# Altium PCB Routed BOARD 3.pcbdoc (part 6 of 7)
Units mil, origin at the board's own origin, x right, y up, seen from the top; angles counter-clockwise.
Board outline 6225 x 7025 mil, 8 copper layers (TopLayer, MidLayer1, MidLayer2, MidLayer3, MidLayer4, MidLayer5, MidLayer6, BottomLayer); 253 components, 548 nets, 2588 pads, 2014 vias.
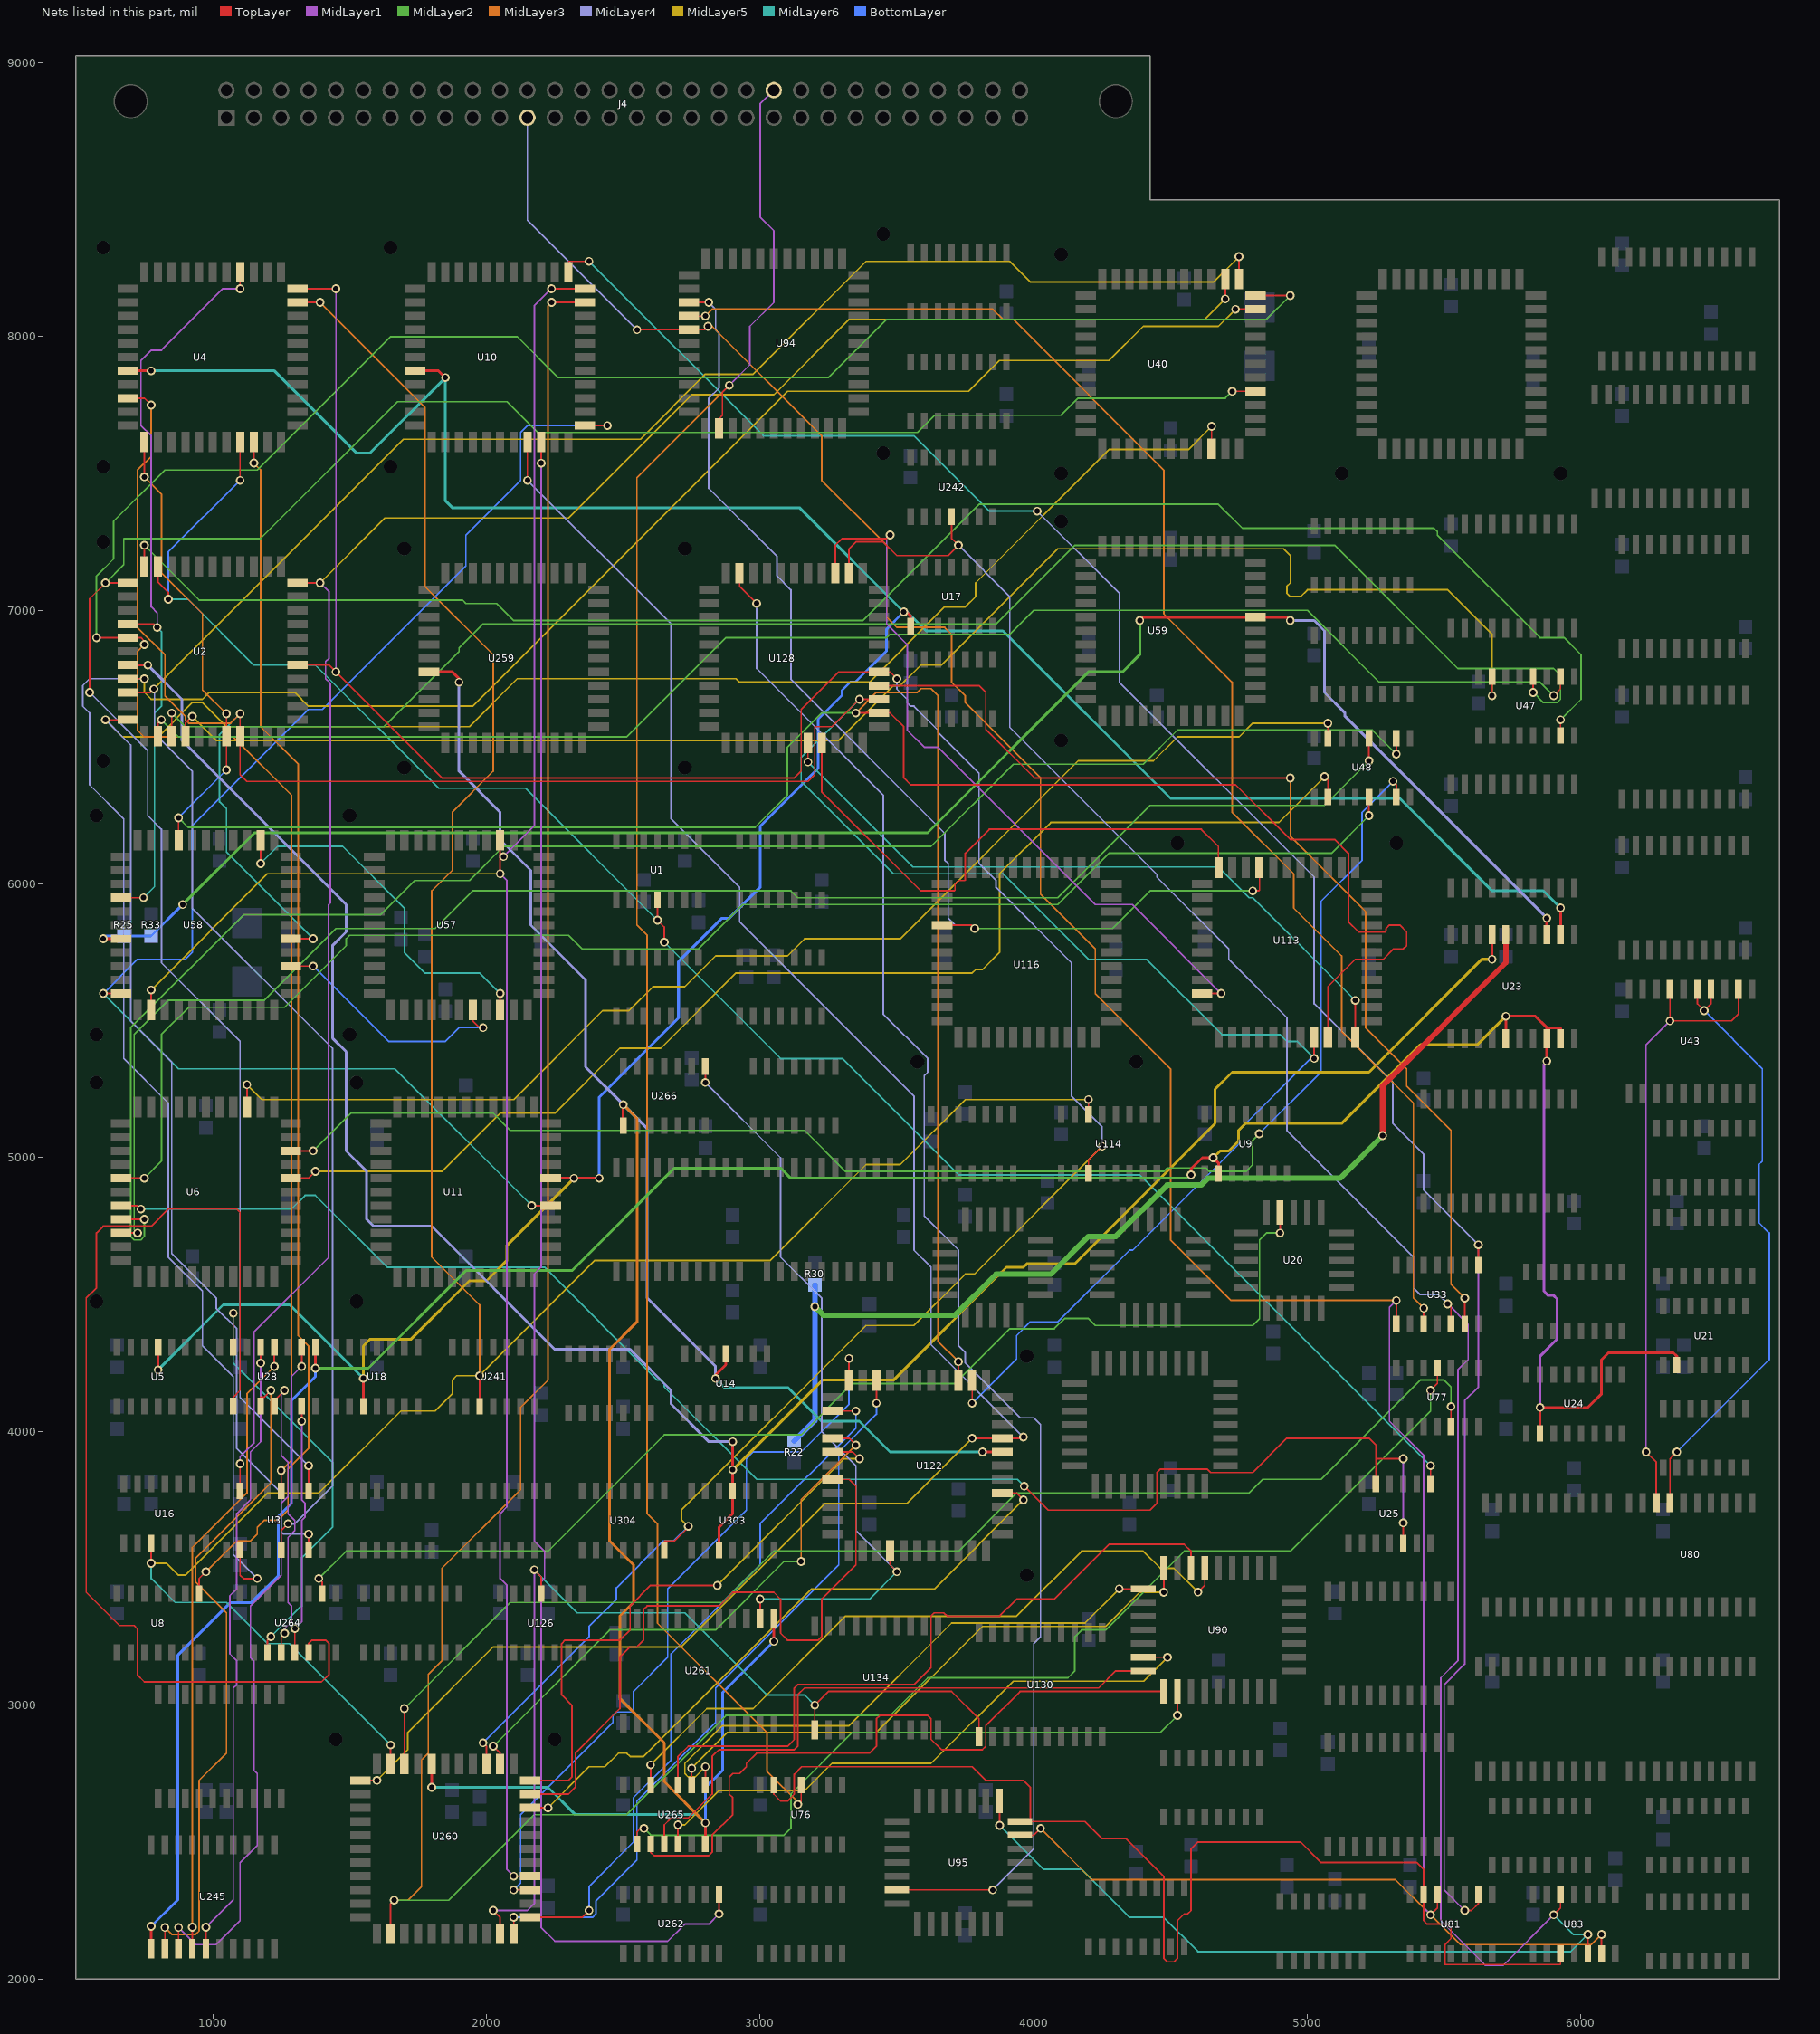
[diagram p12: the nets of this part, all layers, seen from the top]

## Via types
v1: diameter 32, hole 20, TopLayer to BottomLayer, 2014 vias

## Nets (pads, with @x,y where several pads share a name; then routed paths per layer and width w, separated by ;. In a path a pad name is that pad's centre, name@x,y a point inside that pad or via, vN(x,y) a via of type N, cw(c..) or ccw(c..) an arc to the next point about the centre after c; other vN are vias at no path point) (continued)
RFD14: U43.14 U43.15 U80.17 | length 2319.9
  TopLayer w6: U80.17@6325,3740 6325,3900 v1(6350,3925) ; U43.15@6425,5615 6425,5562.5 v1(6450,5537.5) ; v1(6450,5537.5) 6475,5562.5 ; v1(6450,5537.5) 6475,5562.5 ; 6475,5562.5 U43.14@6475,5615 6475,5562.5
  BottomLayer w6: v1(6350,3925) 6687.5,4262.5 6687.5,4725 6650,4762.5 6650,4975 6662.5,4987.5 6662.5,5325 v1(6450,5537.5)
RFD15: U43.12 U43.17 U80.18 | length 2392.1
  TopLayer w6: v1(6237.5,3925) 6275,3887.5 U80.18@6275,3740 ; U43.12@6575,5615 6575,5525 6550,5500 v1(6325,5500) ; v1(6325,5500) U43.17@6325,5615 v1(6325,5500)
  MidLayer1 w6: v1(6237.5,3925) 6237.5,5412.5 v1(6325,5500)
RFLAST: U113.4 U128.20 | length 2683
  TopLayer w6: U128.20@3275,7135 3275,7237.5 3300,7262.5 3462.5,7262.5 v1(3475,7275) ; U113.4@4615,5600 v1(4685,5600)
  MidLayer1 w6: v1(3475,7275) 3462.5,7262.5 3462.5,6950 3537.5,6875 3537.5,6562.5 3600,6500 3650,6500 4225,5925 4360,5925 v1(4685,5600)
RPA4: U113.39 U128.3 | length 2044.5
  TopLayer w6: U128.3@3225,6515 3225,6337.5 3587.5,5975 3710,5975 3712.5,5977.5 3712.5,6000 3725,6012.5 3747.5,6012.5 3750,6015 3750,6112.5 3837.5,6200 4612.5,6200 4675,6137.5 U113.39@4675,6060
RPA5: U113.17 U128.2 | length 2565.1
  TopLayer w6: v1(3175,6445.5) U128.2@3175,6515 ; U113.17@5175,5440 v1(5175,5575)
  MidLayer6 w6: v1(3175,6445.5) 3558,6062.5 4675,6062.5 4787.5,5950 4800,5950 v1(5175,5575)
RPACK: U33.5 U83.5 U83.12 U95.26 U128.19 U242.4 | length 10277.4
  TopLayer w6: U128.19@3325,7135 3325,7225 3350,7250 3450,7250 3500,7200 3687.5,7200 v1(3725,7237.5) ; v1(3875,2561) U95.26@3875,2650 ; 3700,7262.5 v1(3725,7237.5) ; 3700,7262.5 U242.4@3700,7342 3700,7262.5 ; 3700,7262.5 v1(3725,7237.5) ; 5525,4453.5 U33.5@5525,4392 5525,4453.5 ; 5525,4453.5 v1(5512.5,4466) 5525,4453.5 ; 5925,2259 v1(5900,2234) 5925,2259 ; 5925,2259 U83.12@5925,2308 5925,2259 ; U83.5@6025,2092 v1(6025,2162.5) U83.5@6025,2092
  MidLayer1 w6: v1(5512.5,4466) 5587.5,4391 5587.5,4262.5 5550,4225 5550,3162.5 5487.5,3100 5487.5,2212.5 5650,2050 5716,2050 v1(5900,2234)
  MidLayer4 w6: v1(3725,7237.5) 3912.5,7050 3912.5,6572.5 4450,6035 4450,6025 4712.5,5762.5 4712.5,5725 4925,5512.5 4925,5100 5387.5,4637.5 5387.5,4525 5412.5,4500 5478.5,4500 v1(5512.5,4466)
  MidLayer6 w6: v1(3875,2561) 4036,2400 4175,2400 4350,2225 4475,2225 4600,2100 5962.5,2100 v1(6025,2162.5) 5971.5,2162.5 v1(5900,2234)
  other v1: 6025,2162.5 5900,2234 5512.5,4466
RPRDY: U33.6 U128.10 | length 3980.9
  TopLayer w6: U128.10@3435,6725 3800,6725 3825,6700 3825,6565 4002.5,6387.5 v1(4937.5,6387.5) ; U33.6@5575,4392 v1(5575,4487.5)
  MidLayer3 w6: v1(4937.5,6387.5) 4937.5,6175 5212.5,5900 5212.5,5475 5362.5,5325 5362.5,5262.5 5525,5100 5525,4537.5 v1(5575,4487.5)
RPREQ: U95.10 U128.27 | length 5727.8
  TopLayer w6: U128.27@2925,7135 2925,7087.5 v1(2987.5,7025) ; U95.10@3500,2325 v1(3850,2325)
  MidLayer4 w6: v1(2987.5,7025) 2987.5,6787.5 3450,6325 3450,5525 3612.5,5362.5 3612.5,5312.5 3600,5300 3600,4787.5 3725,4662.5 3725,4312.5 3750,4287.5 3750,4250 3950,4050 4000,4050 4025,4025 4025,3250 4000,3225 4000,2475 v1(3850,2325)
RS0: U122.8 U260.18 | length 2539.2
  TopLayer w6: U260.18@2160,2225 2350,2225 v1(2375,2250) ; U122.8@3265,4075 v1(3350,4075)
  BottomLayer w6: v1(2375,2250) 2375,2337.5 2537.5,2500 2537.5,2662.5 2675,2800 2675,3187.5 3000,3512.5 3000,3662.5 3350,4012.5 v1(3350,4075)
RS1: U122.4 U260.17 | length 2737.2
  TopLayer w6: U260.17@2100,2165 v1(2100,2225) ; v1(3425,4103) U122.4@3425,4185
  BottomLayer w6: v1(2100,2225) 2387.5,2225 2400,2237.5 2400,2284 2550,2434 2550,2650 2837.5,2937.5 2837.5,3062.5 3287.5,3512.5 3287.5,3925 3425,4062.5 v1(3425,4103)
RS2: U122.6 U260.20 | length 2726.1
  TopLayer w6: v1(2100,2325) U260.20@2160,2325 ; U122.6@3325,4185 v1(3325,4267)
  BottomLayer w6: v1(2100,2325) 2125,2350 2125,2600 2462.5,2937.5 2462.5,2961.5 2476,2975 2531,2975 2537.5,2981.5 2537.5,3050 2662.5,3175 2662.5,3425 2950,3712.5 2950,3900 2975,3925 3150,3925 3325,4100 v1(3325,4267)
RT0: U2.2 U4.40 U58.25 U113.15 U122.42 U128.8 | length 10677.5
  TopLayer w6: v1(750,7487.5) U4.40@750,7615 ; v1(1050,6417) U2.2@1050,6540 v1(1050,6622) ; U122.42@3725,4185 v1(3725,4255) ; U113.15@5075,5440 5075,5625 5175,5725 5277.5,5725 5315,5762.5 5350,5762.5 5362.5,5775 5362.5,5825 5337.5,5850 5300,5850 5287.5,5837.5 5287.5,5827.5 5285,5825 5187.5,5825 5150,5862.5 5150,6112.5 5100,6162.5 4937.5,6162.5 4737.5,6362.5 3550,6362.5 3525,6387.5 3525,6575 3475,6625 U128.8@3435,6625 ; U128.8@3435,6625 v1(3350,6625) U128.8@3435,6625 ; U58.25@875,6160 v1(875,6242) U58.25@875,6160
  MidLayer2 w6: v1(875,6242) 910,6207 2982,6207 3100,6325 3100,6500 3225,6625 v1(3350,6625)
  MidLayer3 w6: v1(750,7487.5) 812.5,7425 812.5,7137.5 962.5,6987.5 962.5,6709.5 v1(1050,6622) ; v1(3350,6625) 3425,6700 3575,6700 3589,6714 3625,6714 3650,6689 3650,4330 v1(3725,4255)
  BottomLayer w6: v1(875,6242) v1(1050,6417)
  other v1: 875,6242 3350,6625
RT1: U2.3 U4.37 U58.11 U113.14 U122.41 U128.9 | length 10353
  TopLayer w6: U4.37@690,7775 750,7775 v1(775,7750) ; U58.11@1285,5800 v1(1367,5800) ; v1(3775,4103) U122.41@3775,4185 ; U2.3@1100,6540 1100,6400 1125,6375 3175,6375 3200,6400 3200,6575 3263,6575 v1(3363,6675) ; U2.3@1100,6540 v1(1100,6622) U2.3@1100,6540 ; v1(3363,6675) U128.9@3435,6675 v1(3363,6675) ; v1(5025,5362.5) U113.14@5025,5440 v1(5025,5362.5)
  MidLayer3 w6: v1(775,7750) 775,7562.5 725,7512.5 725,6937.5 825,6837.5 825,6687.5 900,6612.5 900,6600 912.5,6587.5 1065.5,6587.5 v1(1100,6622)
  MidLayer6 w6: v1(1100,6622) 1025,6547 1025,6300 1050,6275 1050,6117 v1(1367,5800) ; v1(3363,6675) 3150,6462 3150,6375 3487.5,6037.5 3887.5,6037.5 4200,5725 4412.5,5725 4687.5,5450 4900,5450 4925,5425 4962.5,5425 v1(5025,5362.5)
  BottomLayer w6: v1(3775,4103) 3937.5,4265.5 3937.5,4350 3987.5,4400 4087.5,4400 4350,4662.5 4362.5,4662.5 4750,5050 4750,5100 5012.5,5362.5 v1(5025,5362.5)
  other v1: 5025,5362.5 1100,6622
RTSTR: U2.32 U4.21 U58.32 | length 2858.3
  TopLayer w6: U58.32@665,5950 v1(747,5950) ; v1(1100,8175) U4.21@1100,8235 ; 784.5,6950 U2.32@690,6950 784.5,6950 ; 784.5,6950 v1(797,6937.5) 784.5,6950
  MidLayer1 w6: v1(797,6937.5) 797,6990.5 775,7012.5 775,7637.5 737.5,7675 737.5,7912.5 775,7950 812.5,7950 1037.5,8175 v1(1100,8175)
  MidLayer6 w6: v1(747,5950) 787.5,5990.5 787.5,6625 812.5,6650 812.5,6922 v1(797,6937.5)
  other v1: 797,6937.5
RXD0: U28.2 U264.6 | length 3974.9
  TopLayer w6: U28.2@1075,4093 1075,4125 1100,4150 1100,4800 1087.5,4812.5 837.5,4812.5 775,4750 600,4750 575,4725 575,4525 537.5,4487.5 537.5,3412.5 659,3291 712.5,3291 725,3278.5 725,3110 750,3085 1397.5,3085 1425,3112.5 1425,3225 1412.5,3237.5 1362.5,3237.5 1350,3225 U264.6@1350,3193
RXD1: U28.7 U264.5 | length 920.7
  TopLayer w6: U264.5@1300,3193 v1(1300,3279.5) ; v1(1325,4037.5) U28.7@1325,4093
  MidLayer1 w6: v1(1300,3279.5) 1325,3304.5 1325,3675 1337.5,3687.5 1337.5,3737.5 1325,3750 v1(1325,4037.5)
RXD2: U28.10 U264.4 | length 1177.1
  TopLayer w6: U264.4@1250,3193 1250,3250 v1(1262.5,3262.5) ; v1(1325,4237.5) U28.10@1325,4308
  MidLayer1 w6: v1(1262.5,3262.5) 1262.5,3279.5 1287.5,3304.5 1287.5,3362.5 1275,3375 1275,3612.5 1300,3637.5 1300,3675 1275,3700 1275,3725 1287.5,3737.5 1287.5,4200 v1(1325,4237.5)
RXD3: U28.15 U264.3 | length 1611.5
  TopLayer w6: U28.15@1075,4308 v1(1075,4432) ; U264.3@1200,3193 1200,3238 v1(1212.5,3250.5)
  MidLayer6 w6: v1(1075,4432) 1075,4250 1437.5,3887.5 1437.5,3650 1325,3537.5 1325,3363 v1(1212.5,3250.5)
RXDM0: U28.4 U245.12 | length 2474.8
  TopLayer w6: U245.12@825,2110 v1(825,2187.5) ; U28.4@1175,4093 1175,4125 1187.5,4125 v1(1212.5,4150)
  MidLayer3 w6: v1(825,2187.5) 850,2162.5 937.5,2162.5 950,2175 950,2725 1050,2825 1050,3337.5 937.5,3450 937.5,3537.5 1212.5,3812.5 v1(1212.5,4150)
RXDM1: U28.5 U245.13 | length 2488.5
  TopLayer w6: U245.13@875,2110 v1(875,2187.5) ; U28.5@1225,4093 1225,4113 v1(1262,4150)
  MidLayer1 w6: v1(875,2187.5) 937.5,2125 1012.5,2125 1100,2212.5 1100,2425 1162.5,2487.5 1162.5,2750 1150,2762.5 1150,3161.5 1137.5,3174 1137.5,3362.5 1250,3475 1250,3737.5 1275,3762.5 1275,3887.5 1250,3912.5 1250,4147.5 1252.5,4150 v1(1262,4150)
RXDM2: U28.12 U245.14 | length 2322.3
  TopLayer w6: U245.14@925,2110 v1(925,2189) ; v1(1225,4237.5) U28.12@1225,4308
  MidLayer3 w6: v1(925,2189) 925,3575 1125,3775 1125,4137.5 v1(1225,4237.5)
RXDM3: U28.13 U245.15 | length 2301.6
  TopLayer w6: U245.15@975,2110 v1(975,2189) ; v1(1175,4250) U28.13@1175,4308
  MidLayer1 w6: v1(975,2189) 1075,2289 1075,3062.5 1087.5,3075 1087.5,3162.5 1062.5,3187.5 1062.5,3400 1087.5,3425 1087.5,3700 1137.5,3750 1137.5,3925 1175,3962.5 v1(1175,4250)
RXDONE: U126.11 U130.11 U134.11 U260.16 | length 3805.9
  TopLayer w6: v1(2025,2250) 2050,2225 U260.16@2050,2165 ; U130.11@3800,2885 3800,2950 3700,3050 3250,3050 v1(3200,3000) ; 2200,3469.5 v1(2175,3494.5) 2200,3469.5 ; 2200,3469.5 U126.11@2200,3408 2200,3469.5 ; v1(3200,3000) U134.11@3200,2910 v1(3200,3000)
  MidLayer1 w6: v1(2025,2250) 2150,2250 2175,2275 v1(2175,3494.5)
  MidLayer6 w6: v1(2175,3494.5) 2332,3337.5 2725,3337.5 3025,3037.5 3162.5,3037.5 v1(3200,3000)
  other v1: 2175,3494.5
RXQS_10: U122.21 U261.14 U266.1 | length 2925.1
  TopLayer w6: v1(2800,5275) U266.1@2800,5333 ; U261.14@3000,3315 v1(3000,3387.5) ; 3475,3512.5 v1(3500,3487.5) 3475,3512.5 ; 3475,3512.5 U122.21@3475,3565 3475,3512.5
  MidLayer4 w6: v1(2800,5275) 3075,5000 3075,4637.5 3225,4487.5 3225,4000 3350,3875 3350,3637.5 v1(3500,3487.5)
  MidLayer6 w6: v1(3000,3387.5) 3400,3387.5 v1(3500,3487.5)
  other v1: 3500,3487.5
RXST: U2.11 U4.17 U114.3 U128.11 U260.31 U304.7 | length 10269.6
  TopLayer w6: U4.17@1310,8175 v1(1450,8175) ; v1(1450,6775) 1425,6800 ; v1(1987.5,2862.5) 2000,2850 U260.31@2000,2785 ; v1(3500,6750) 3475,6775 U128.11@3435,6775 3287.5,6775 3150,6637.5 3150,6412.5 3125,6387.5 1837.5,6387.5 1425,6800 ; 1425,6800 U2.11@1310,6800 1425,6800 ; 2650,3597.5 2652.5,3600 ; 2650,3597.5 U304.7@2650,3567 2650,3597.5 ; 2650,3597.5 2652.5,3600 ; 2652.5,3600 2687.5,3600 ; 2652.5,3600 2687.5,3600 ; 2687.5,3600 v1@2737.5,3650 ; 2687.5,3600 v1@2737.5,3650 ; v1@2737.5,3650 v1(2737.5,3653.5) v1@2737.5,3650 ; 4200,4992 U114.3@4200,4943 4200,4992 ; 4200,4992 v1(4250,5042) 4200,4992
  MidLayer1 w6: v1(1450,6775) v1(1450,8175)
  MidLayer4 w6: v1(3500,6750) 3500,6712.5 3537.5,6675 3537.5,6662.5 3550,6650 3562.5,6650 3650,6562.5 3650,6555 3800,6405 3800,6075 3862.5,6012.5 3862.5,5987.5 4137.5,5712.5 4137.5,5225 4250,5112.5 v1(4250,5042)
  MidLayer5 w6: v1(2737.5,3653.5) 2712.5,3678.5 2712.5,3712.5 3387.5,4387.5 3562.5,4387.5 3750,4575 3783,4575 v1(4250,5042)
  BottomLayer w6: v1(1987.5,2862.5) 2375,3250 2375,3287.5 2475,3387.5 2475,3428.5 2646.5,3600 2684,3600 v1(2737.5,3653.5)
  other v1: 2737.5,3653.5 4250,5042
RXTO: U10.3 U122.36 U260.40 | length 7365
  TopLayer w6: U260.40@1540,2725 v1(1600,2725) ; v1(2150,7475) U10.3@2150,7615 ; v1(3775,3975) U122.36@3885,3975 3958,3975 v1(3962.5,3979.5)
  MidLayer4 w6: v1(2150,7475) 2675,6950 2675,6237.5 2925,5987.5 2925,5862.5 3562.5,5225 3562.5,4662.5 3625,4600 3625,4317 v1(3962.5,3979.5)
  MidLayer5 w6: v1(1600,2725) 1712.5,2837.5 1712.5,2900 2025,3212.5 2712.5,3212.5 3237.5,3737.5 3537.5,3737.5 v1(3775,3975)
SCLK: U14.11 U122.35 U259.35 U260.35 U261.13 U265.7 U266.8 | length 9755.9
  TopLayer w10: U259.35@1790,6775 1875,6775 1900,6750 v1(1900,6737.5) ; v1(1800,2700) U260.35@1800,2785 ; v1(3050,3233) U261.13@3050,3315 ; v1(3813,3925) U122.35@3885,3925 ; U266.8@2500,5117 v1(2500,5194) ; U266.8@2500,5117 v1(2500,5194) ; U266.8@2500,5117 v1(2500,5194) ; U265.7@2800,2493 v1(2800,2570) ; U265.7@2800,2493 v1(2800,2570) ; U265.7@2800,2493 v1(2800,2570) ; v1@2837.5,4206 2875,4243.5 ; v1@2837.5,4206 v1(2837.5,4193.5) v1@2837.5,4206 ; v1@2837.5,4206 2875,4243.5 ; 2875,4243.5 U14.11@2875,4283 2875,4243.5
  MidLayer3 w10: v1(2500,5194) 2550,5144 2550,4400 2450,4300 2450,3600 2537.5,3512.5 2537.5,3375 2487.5,3325 2487.5,3025 2650,2862.5 2650,2720 v1(2800,2570)
  MidLayer4 w10: v1(1900,6737.5) 1900,6412.5 2050,6262.5 2050,6162.5 2162.5,6050 2162.5,5850 2362.5,5650 2362.5,5331.5 v1(2500,5194) 2587.5,5106.5 2587.5,4487.5 2837.5,4237.5 v1(2837.5,4193.5)
  MidLayer6 w10: v1(1800,2700) 2225,2700 2325,2600 2770,2600 v1(2800,2570) ; v1(2837.5,4193.5) 2871,4160 3102.5,4160 3225,4037.5 3362.5,4037.5 3475,3925 v1(3813,3925)
  BottomLayer w10: v1(2800,2570) 2800,2698.5 2862.5,2761 2862.5,3045.5 v1(3050,3233)
  other v1: 2800,2570 2800,2570 2837.5,4193.5 2500,5194 2500,5194
SCT0: U57.2 U58.9 | length 926
  TopLayer w6: U58.9@1285,5700 v1(1367,5700) ; U57.2@1950,5540 1950,5500 1975,5475 v1(1988,5475)
  BottomLayer w6: v1(1367,5700) 1642,5425 1850,5425 1900,5475 v1(1988,5475)
SCT1: U57.4 U58.19 | length 1363.7
  TopLayer w6: v1(1175,6075) U58.19@1175,6160 ; U57.4@2050,5540 v1(2050,5600)
  MidLayer6 w6: v1(1175,6075) 1237.5,6137.5 1475,6137.5 1700,5912.5 1700,5750 1775,5675 1975,5675 v1(2050,5600)
SE0: U2.39 U3.7 U40.4 | length 8289.2
  TopLayer w6: U3.7@1350,3568 v1(1350,3625) ; U40.4@4650,7590 v1(4650,7672) ; v1(608,6600) U2.39@690,6600 v1(608,6600)
  MidLayer4 w6: v1(608,6600) 700,6508 700,5500 850,5350 850,4650 1012.5,4487.5 1012.5,4450 1087.5,4375 1087.5,3937.5 1250,3775 1250,3633 1258,3625 v1(1350,3625)
  MidLayer5 w6: v1(608,6600) 670.5,6537.5 800,6537.5 925,6662.5 962.5,6662.5 1050,6575 1937.5,6575 2112.5,6750 2912.5,6750 2925,6737.5 3400,6737.5 3675,7012.5 3750,7012.5 3787.5,7050 3787.5,7100 4275,7587.5 4565.5,7587.5 v1(4650,7672)
  other v1: 608,6600
SE180: U2.29 U3.10 U40.10 | length 8477.5
  TopLayer w6: v1(550,6700) 550,7042 v1(608,7100) ; U3.10@1350,3783 v1(1350,3875) ; v1(4725,7800) U40.10@4810,7800 ; v1(608,7100) U2.29@690,7100 v1(608,7100)
  MidLayer2 w6: v1(608,7100) 675,7167 675,7262.5 1175,7262.5 1675,7762.5 2075,7762.5 2187.5,7650 3575,7650 3637.5,7712.5 4100,7712.5 4162.5,7775 4700,7775 v1(4725,7800)
  MidLayer4 w6: v1(550,6700) 762.5,6487.5 762.5,6250 812.5,6200 812.5,5712.5 1100,5425 1100,4125 v1(1350,3875)
SL0: U2.33 U3.12 U40.17 | length 9078.3
  TopLayer w6: v1(575,6900) U2.33@690,6900 737.5,6900 750,6887.5 v1(750,6875) ; U3.12@1250,3783 v1(1250,3857) ; U40.17@4810,8150 v1(4937.5,8150)
  MidLayer2 w6: v1(575,6900) 575,7125 637.5,7187.5 637.5,7325 825,7512.5 1162.5,7512.5 1650,8000 2112.5,8000 2262.5,7850 3250,7850 3462.5,8062.5 4850,8062.5 v1(4937.5,8150)
  MidLayer3 w6: v1(750,6875) 725,6850 725,6562.5 750,6537.5 1075,6537.5 1287.5,6325 1287.5,3894.5 v1(1250,3857)
SL180: U2.17 U3.15 U40.19 | length 7453.6
  TopLayer w6: U3.15@1100,3783 v1(1100,3882) ; v1(4700,8137.5) U40.19@4700,8210 ; U2.17@1310,7100 v1(1392,7100) U2.17@1310,7100
  MidLayer1 w6: v1(1100,3882) 1100,3907 1150,3957 1150,4362.5 1423.5,4636 1423.5,5925 1429.5,5931 1429.5,6733 1412.5,6750 1412.5,6812.5 1425,6825 1425,7067 v1(1392,7100)
  MidLayer5 w6: v1(1392,7100) 1629.5,7337.5 2300,7337.5 2750,7787.5 3050,7787.5 3325,8062.5 4625,8062.5 v1(4700,8137.5)
  other v1: 1392,7100
SLOT: U1.11 U2.27 U4.3 U25.8 | length 7124.5
  TopLayer w6: v1(1100,7475) U4.3@1100,7615 ; v1(2650,5787.5) 2650,5843 v1(2625,5868) ; U25.8@5450,3808 v1(5450,3875) ; 800,7103 U2.27@800,7160 800,7103 ; 800,7103 837.5,7065.5 ; 800,7103 837.5,7065.5 ; 837.5,7065.5 v1(837.5,7040.5) 837.5,7065.5 ; v1(2625,5868) U1.11@2625,5942 v1(2625,5868)
  MidLayer6 w6: v1(837.5,7040.5) 909.5,7040.5 1150,6800 1375,6800 1825,6350 2143,6350 v1(2625,5868) ; v1(2650,5787.5) 3075,5362.5 3300,5362.5 3725,4937.5 4387.5,4937.5 v1(5450,3875)
  BottomLayer w6: v1(837.5,7040.5) 837.5,7212.5 v1(1100,7475)
  other v1: 837.5,7040.5
SLOTCLK: U6.35 U25.5 U25.12 | length 5931.9
  TopLayer w6: U6.35@665,4825 725,4825 v1(737.5,4812.5) ; v1(3965,3800) 4052.5,3712.5 4425,3712.5 4450,3737.5 4450,3850 4462.5,3862.5 4633.5,3862.5 4646,3850 4800,3850 4925,3975 5225,3975 5250,3950 U25.12@5250,3808 5250,3900 v1(5350,3900) ; U25.5@5350,3592 v1(5350,3666)
  MidLayer1 w6: v1(5350,3666) v1(5350,3900)
  MidLayer6 w6: v1(737.5,4812.5) 1287.5,4812.5 1337.5,4862.5 1375,4862.5 1637.5,4600 2212.5,4600 2625,4187.5 2637.5,4187.5 2650,4175 2650,4162.5 2987.5,3825 3940,3825 v1(3965,3800)
SLOTL0: U6.20 U48.15 | length 4678.6
  TopLayer w6: U6.20@1125,5185 v1(1125,5267) ; U48.15@5075,6533 v1(5075,6587.5)
  MidLayer5 w6: v1(1125,5267) 1179.5,5212.5 2100,5212.5 2425,5537.5 2521.5,5537.5 2609,5625 2725,5625 2837.5,5737.5 3100,5737.5 3162.5,5800 3512.5,5800 4162.5,6450 4437.5,6450 4525,6537.5 4750,6537.5 4800,6587.5 v1(5075,6587.5)
SLOTL1: U6.37 U48.12 | length 5820.6
  TopLayer w6: U6.37@665,4725 v1(725,4725) ; v1(5225,6450) U48.12@5225,6533
  MidLayer2 w6: v1(725,4725) 712.5,4737.5 712.5,5450 837.5,5575 1187.5,5575 1450,5837.5 1812.5,5837.5 1950,5975 3112.5,5975 3137.5,5950 4087.5,5950 4425,6287.5 5062.5,6287.5 v1(5225,6450)
SLOTL2: U6.36 U48.10 | length 6140.1
  TopLayer w6: U6.36@665,4775 v1(750,4775) ; v1(5325,6475) U48.10@5325,6533
  MidLayer2 w6: v1(750,4775) 750,4712.5 737.5,4700 712.5,4700 700,4712.5 700,5475 1112.5,5887.5 1612.5,5887.5 1737.5,6012.5 1937.5,6012.5 2062.5,6137.5 3625,6137.5 3925,6437.5 4400,6437.5 4525,6562.5 5237.5,6562.5 v1(5325,6475)
SLOTL3: U6.15 U48.7 | length 5355.1
  TopLayer w6: U6.15@1285,5025 v1(1367,5025) ; v1(5313,6375) 5325,6363 U48.7@5325,6318
  MidLayer2 w6: v1(1367,5025) 1504.5,5162.5 2025,5162.5 2087.5,5100 3162.5,5100 3312.5,4950 4475,4950 4487.5,4962.5 4629.5,4962.5 4642,4950 4775,4950 4800,4975 4800,5063.5 v1(4824,5087.5)
  BottomLayer w6: v1(4824,5087.5) 5050,5313.5 5050,5937.5 5200,6087.5 5200,6262 v1(5313,6375)
SLOTL4: U6.33 U48.5 | length 5503.8
  TopLayer w6: U6.33@665,4925 v1(750,4925) ; v1(5225,6250) U48.5@5225,6318
  MidLayer2 w6: v1(750,4925) 812.5,4987.5 812.5,5450 912.5,5550 1262.5,5550 1487.5,5775 1487.5,5800 1500,5812.5 2300,5812.5 2350,5762.5 2775,5762.5 2937.5,5925 4087.5,5925 4275,6112.5 5087.5,6112.5 v1(5225,6250)
SLOTL5: U6.13 U48.2 | length 4632.7
  TopLayer w6: U6.13@1285,4925 1350,4925 v1(1375,4950) ; v1(5062.5,6392) 5075,6379.5 U48.2@5075,6318
  MidLayer5 w6: v1(1375,4950) 1837.5,4950 2050,5162.5 2250,5162.5 2487.5,5400 2637.5,5400 2912.5,5675 3775,5675 3787.5,5687.5 3812.5,5687.5 3875,5750 3875,6037.5 4062.5,6225 4895.5,6225 v1(5062.5,6392)
SM0: U2.36 U3.2 U40.16 | length 8794.6
  TopLayer w6: U3.2@1100,3568 1100,3475 1112.5,3462.5 v1(1162.5,3462.5) ; v1(4737.5,8100) U40.16@4810,8100 ; U2.36@690,6750 v1(750,6750) U2.36@690,6750
  MidLayer4 w6: v1(750,6750) 550,6750 525,6725 525,6650 550,6625 550,6362.5 675,6237.5 675,5362.5 837.5,5200 837.5,4637.5 962.5,4512.5 962.5,4312.5 1075,4200 1075,3550 v1(1162.5,3462.5)
  MidLayer5 w6: v1(750,6750) 750,6700 775,6675 962.5,6675 987.5,6700 1300,6700 1350,6650 1950,6650 3100,7800 3762.5,7800 3875,7912.5 4275,7912.5 4400,8037.5 4675,8037.5 v1(4737.5,8100)
  other v1: 750,6750
SM180: U2.37 U3.5 U40.18 | length 8470.5
  TopLayer w6: U3.5@1250,3568 1250,3637.5 v1(1275,3662.5) ; U40.18@4750,8210 v1(4750,8292) ; 772,6700 v1(784.5,6712.5) 772,6700 ; 772,6700 U2.37@690,6700 772,6700
  MidLayer4 w6: v1(784.5,6712.5) 787.5,6709.5 787.5,6550 925,6412.5 925,5912.5 1437.5,5400 1437.5,3800 1300,3662.5 v1(1275,3662.5)
  MidLayer5 w6: v1(784.5,6712.5) 1697,7625 2562.5,7625 2800,7862.5 2975,7862.5 3387.5,8275 3912.5,8275 3987.5,8200 4658,8200 v1(4750,8292)
  other v1: 784.5,6712.5
STDMA: U94.9 U113.36 U116.21 | length 4258.9
  TopLayer w6: U94.9@2740,8125 v1(2812.5,8125) ; v1(4800,5975) 4822.5,5975 4825,5977.5 U113.36@4825,6060 ; 3772,5850 U116.21@3665,5850 3772,5850 ; 3772,5850 v1(3784.5,5837.5) 3772,5850
  MidLayer2 w6: v1(3784.5,5837.5) 4287.5,5837.5 4425,5975 v1(4800,5975)
  MidLayer4 w6: v1(2812.5,8125) 2837.5,8100 2837.5,8025 2850,8012.5 2850,7812.5 2812.5,7775 2812.5,7445.5 3062,7196 3062,7125.5 3112.5,7075 3112.5,6748 3675,6185.5 3675,6087.5 3687.5,6075 3687.5,5875 3712.5,5850 3772,5850 v1(3784.5,5837.5)
  other v1: 3784.5,5837.5
SYMCLK: R25.2 R33.2 U23.13 U58.35 U59.13 | length 6554.7
  TopLayer w10: v1(600,5800) U58.35@665,5800 ; v1(4387.5,6962.5) 4400,6975 U59.13@4810,6975 4925,6975 v1(4937.5,6962.5) ; U23.13@5875,5815 v1(5875,5875)
  MidLayer2 w10: v1(890,5925) 1152.5,6187.5 3612.5,6187.5 4200,6775 4325,6775 4387.5,6837.5 v1(4387.5,6962.5)
  MidLayer4 w10: v1(4937.5,6962.5) 5025,6962.5 5062.5,6925 5062.5,6700 5137.5,6625 5137.5,6612.5 v1(5875,5875)
  BottomLayer w10: v1(600,5800) 610,5810 R25.2@675,5810 R33.2@775,5810 v1(890,5925)
SYMCLK1: U4.35 U5.11 U10.35 U11.13 U17.1 U18.3 U23.12 | length 12322.1
  TopLayer w10: U4.35@690,7875 v1(775,7875) ; v1(800,4225) U5.11@800,4308 ; v1(2320,4925) U11.13@2235,4925 v1(2412.5,4925) ; U23.12@5925,5815 v1(5925,5912.5) ; 1825,7875 v1(1850,7850) 1825,7875 ; 1825,7875 U10.35@1740,7875 1825,7875 ; v1(3525,6994) v1@3535,6994 ; v1(3525,6994) v1@3535,6994 ; v1(3525,6994) v1@3535,6994 ; v1@3535,6994 3550,6979 ; v1@3535,6994 3550,6979 ; v1@3535,6994 3550,6979 ; U17.1@3550,6942 3550,6979 ; U17.1@3550,6942 3550,6979 ; U17.1@3550,6942 3550,6979 ; U18.3@1550,4092 v1(1550,4194) U18.3@1550,4092
  MidLayer5 w10: v1(1550,4194) 1550,4312.5 1575,4337.5 1725,4337.5 1937.5,4550 2000,4550 2075,4625 2075,4680 v1(2320,4925)
  MidLayer6 w10: v1(775,7875) 1225,7875 1525,7575 1575,7575 v1(1850,7850) 1850,7400 1875,7375 3144,7375 v1(3525,6994) 3537.5,6994 3606.5,6925 3887.5,6925 4500,6312.5 5337.5,6312.5 5675,5975 5862.5,5975 v1(5925,5912.5) ; v1(800,4225) 1037.5,4462.5 1281.5,4462.5 v1(1550,4194)
  BottomLayer w10: v1(2412.5,4925) 2412.5,5221.5 2702,5511 2702,5716.5 2860.5,5875 2887.5,5875 3000,5987.5 3000,6210.5 3212.5,6423 3212.5,6602 3300,6689.5 3300,6708 3329.5,6737.5 3348,6737.5 3462.5,6852 3462.5,6931.5 v1(3525,6994)
  other v1: 1550,4194 3525,6994 3525,6994 1850,7850
SYMCLK2: R22.2 R30.2 U23.16 | length 3960
  TopLayer w20: v1(5275,5081) 5275,5262.5 5725,5712.5 U23.16@5725,5815
  MidLayer2 w20: v1(3200,4456) 3231,4425 3712.5,4425 3862.5,4575 4062.5,4575 4200,4712.5 4300,4712.5 4487.5,4900 4612.5,4900 4637.5,4925 5119,4925 v1(5275,5081)
  BottomLayer w20: R22.2@3125,3965 3200,4040 R30.2@3200,4535 v1(3200,4456)
SYMCLKM: U9.2 U21.2 U23.5 U23.8 U23.9 U24.2 U28.9 U245.11 | length 10441.8
  TopLayer w10: U245.11@775,2110 v1(775,2192) ; v1(4575,4937.5) 4575,4959 4616,5000 v1(4656,5000) ; v1(5875,5353) U23.8@5875,5435 ; U23.9@5925,5435 5925,5472.5 5922.5,5475 5875,5475 ; U21.2@6350,4242 6350,4275 6337.5,4287.5 6100,4287.5 6075,4262.5 6075,4137.5 6025,4087.5 v1(5850,4087.5) ; v1(4656,5000) 4675,4981 ; v1(4656,5000) 4675,4981 ; 4675,4981 U9.2@4675,4942 4675,4981 ; v1(5725,5517) U23.5@5725,5435 v1(5725,5517) ; v1(5725,5517) 5833,5517 5875,5475 ; v1(5850,4087.5) U24.2@5850,3993 v1(5850,4087.5) ; U23.8@5875,5435 5875,5475 ; U23.8@5875,5435 5875,5475 ; v1(1375,4231) U28.9@1375,4308 v1(1375,4231)
  MidLayer1 w10: v1(5850,4087.5) 5850,4275 5912.5,4337.5 5912.5,4484 5900,4496.5 5880.5,4496.5 5864.5,4512.5 5864.5,5342.5 v1(5875,5353)
  MidLayer2 w10: v1(1375,4231) 1568.5,4231 1925,4587.5 2312.5,4587.5 2687.5,4962.5 3075,4962.5 3112.5,4925 4562.5,4925 v1(4575,4937.5)
  MidLayer5 w10: v1(4656,5000) 4681,5025 4712.5,5025 4748,5060.5 4748,5100 4773,5125 5125,5125 5412.5,5412.5 5620.5,5412.5 v1(5725,5517)
  BottomLayer w10: v1(775,2192) 873,2290 873,3183 1065,3375 1141.5,3375 1239.5,3473 1239.5,3689.5 1287.5,3737.5 1287.5,4112.5 1375,4200 v1(1375,4231)
  other v1: 1375,4231
SYMCLKN: U2.35 U23.17 U303.3 U303.11 | length 8377.6
  TopLayer w10: U2.35@690,6800 v1(762.5,6800) ; U303.3@2850,3567 2850,3650 2900,3700 U303.11@2900,3783 ; v1(2900,3860) U303.11@2900,3783 ; v1(2900,3962.5) U303.11@2900,3783 ; v1(5675,5725) U23.17@5675,5815
  MidLayer4 w10: v1(762.5,6800) 887.5,6675 887.5,6525 1487.5,5925 1487.5,5825 1437.5,5775 1437.5,5437.5 1487.5,5387.5 1487.5,5025 1562.5,4950 1562.5,4775 1587.5,4750 1800,4750 2250,4300 2525,4300 2675,4150 2675,4100 2812.5,3962.5 v1(2900,3962.5)
  MidLayer5 w10: v1(2900,3860) 3227.5,4187.5 3487.5,4187.5 3900,4600 3962.5,4600 3975,4612.5 4150,4612.5 4662.5,5125 4662.5,5250 4725,5312.5 5225,5312.5 5637.5,5725 v1(5675,5725)
SYMLD: U20.12 U264.10 | length 4359.2
  TopLayer w6: v1(1387.5,3462.5) 1400,3450 U264.10@1400,3408 ; v1(4900,4725) U20.12@4900,4800
  MidLayer2 w6: v1(1387.5,3462.5) 1487.5,3562.5 2225,3562.5 2650,3987.5 3150,3987.5 3337.5,4175 3712.5,4175 3912.5,4375 4075,4375 4112.5,4412.5 4200,4412.5 4225,4387.5 4800,4387.5 4825,4412.5 4825,4700 4850,4725 v1(4900,4725)
TC0: U122.10 U260.30 | length 2083.1
  TopLayer w6: v1(2025,2850) 2050,2825 U260.30@2050,2785 ; U122.10@3265,3975 3325,3975 v1(3350,3950)
  MidLayer2 w6: v1(2025,2850) 2450,3275 2837.5,3275 3087.5,3525 v1(3150,3525)
  MidLayer3 w6: v1(3150,3525) 3150,3750 v1(3350,3950)
TC1: U122.11 U260.28 | length 2187.9
  TopLayer w6: U260.28@2160,2725 2300,2725 2312.5,2737.5 2312.5,3000 2275,3037.5 2275,3225 2287.5,3237.5 2487.5,3237.5 2525,3275 2525,3362.5 2600,3437.5 v1(2844,3437.5) ; U122.11@3265,3925 3338,3925 v1(3363,3900)
  MidLayer5 w6: v1(2844,3437.5) 3306.5,3900 v1(3363,3900)
TC2: U122.13 U260.27 | length 2467.5
  TopLayer w6: U260.27@2160,2675 2300,2675 2325,2700 2325,2825 2487.5,2987.5 2487.5,3175 2525,3212.5 2550,3212.5 2575,3237.5 2575,3350 2587.5,3362.5 2850,3362.5 2900,3412.5 3050,3412.5 3075,3387.5 3075,3262.5 3100,3237.5 3212.5,3237.5 3225,3250 3225,3387.5 3350,3512.5 3350,3800 3325,3825 U122.13@3265,3825
TC3: U122.32 U260.26 | length 2366.7
  TopLayer w6: U260.26@2160,2625 v1(2225,2625) ; U122.32@3885,3775 3937.5,3775 v1(3962.5,3750)
  MidLayer5 w6: v1(2225,2625) 2375,2775 2433,2775 2483,2825 2512.5,2825 2525,2812.5 2575,2812.5 3187.5,3425 3637.5,3425 v1(3962.5,3750)
TDACK: U76.13 U81.13 U83.3 U95.25 | length 4470.9
  TopLayer w6: U76.13@3050,2708 3050,2675 3075,2650 3100,2650 3125,2675 3125,2747.5 3152.5,2775 3775,2775 3825,2725 3962.5,2725 3987.5,2700 3987.5,2575 U95.25@3950,2575 4187.5,2575 4250,2512.5 4337.5,2512.5 4475,2375 4475,2075 4487.5,2062.5 4512.5,2062.5 4525,2075 4525,2212.5 4550,2237.5 4562.5,2237.5 4575,2250 4575,2475 4600,2500 4975,2500 5050,2425 5400,2425 5425,2400 U81.13@5425,2308 5425,2212.5 5437.5,2200 5512.5,2200 5525,2187.5 5525,2147.5 5502.5,2125 5502.5,2052.5 5925,2052.5 U83.3@5925,2092
TDRDY: J4.42 U76.11 U94.19 | length 7187.9
  TopLayer w6: v1(3137.5,2637.5) 3150,2650 U76.11@3150,2708 ; U94.19@2850,7700 U94.19@2850,7665 U94.19@2850,7700 ; U94.19@2850,7700 2862.5,7712.5 ; U94.19@2850,7700 2862.5,7712.5 ; 2862.5,7712.5 2862.5,7797 ; 2862.5,7712.5 2862.5,7797 ; 2862.5,7797 v1(2887.5,7822) 2862.5,7797
  MidLayer1 w6: v1(2887.5,7822) 2962.5,7897 2962.5,8037.5 3050,8125 3050,8387.5 3000,8437.5 3000,8850 J4.42@3050,8900
  MidLayer3 w6: v1(2887.5,7822) 2550,7484.5 2550,5850 2587.5,5812.5 2587.5,3700 2625,3662.5 2625,3300 3025,2900 3025,2759 3146.5,2637.5 v1(3137.5,2637.5)
  other v1: 2887.5,7822
TF0: U90.10 U265.14 | length 2556.6
  TopLayer w6: U265.14@2600,2708 v1(2600,2782) ; v1(4600,3413) 4625,3438 U90.10@4625,3500
  MidLayer5 w6: v1(2600,2782) 2805.5,2987.5 2975,2987.5 3312.5,3325 3937.5,3325 4175,3562.5 4400,3562.5 4462.5,3500 4513,3500 v1(4600,3413)
TF1: U90.11 U265.12 | length 2604.3
  TopLayer w6: U265.12@2700,2708 2700,2812.5 2737.5,2850 3100,2850 3125,2875 3125,3062.5 3137.5,3075 3562.5,3075 3625,3137.5 3625,3326.5 3636,3337.5 3671.5,3337.5 3684,3325 3875,3325 3937.5,3387.5 4075,3387.5 4275,3587.5 4550,3587.5 4575,3562.5 U90.11@4575,3500
TF2: U90.13 U265.11 | length 2140.3
  TopLayer w6: U265.11@2750,2708 v1(2750,2769.5) ; v1(4475,3412.5) U90.13@4475,3500
  MidLayer5 w6: v1(2750,2769.5) 2880.5,2900 3425,2900 3812.5,3287.5 4262.5,3287.5 4387.5,3412.5 v1(4475,3412.5)
TF3: U90.14 U265.10 | length 2139.3
  TopLayer w6: U265.10@2800,2708 v1(2800,2775) ; v1(4312.5,3425) U90.14@4400,3425
  MidLayer5 w6: v1(2800,2775) 2762.5,2737.5 2737.5,2737.5 2725,2750 2725,2787.5 2862.5,2925 3325,2925 3700,3300 4187.5,3300 v1(4312.5,3425)
TF4: U90.19 U265.5 | length 2201.2
  TopLayer w6: U265.5@2700,2493 v1(2700,2562.5) ; U90.19@4400,3175 v1(4489,3175)
  MidLayer5 w6: v1(2700,2562.5) 2724.5,2562.5 2849.5,2687.5 3162.5,2687.5 3262.5,2787.5 3625,2787.5 3925,3087.5 4401.5,3087.5 v1(4489,3175)
TF5: U90.20 U265.4 | length 2242.9
  TopLayer w6: U265.4@2650,2493 2650,2562.5 2675,2587.5 2737.5,2587.5 2825,2675 2825,2812.5 2850,2837.5 3125,2837.5 3137.5,2850 3137.5,3037.5 3162.5,3062.5 4237.5,3062.5 4300,3125 U90.20@4400,3125
TF6: U90.21 U265.3 | length 2551.4
  TopLayer w6: U265.3@2600,2493 2600,2462.5 2612.5,2450 2812.5,2450 2825,2462.5 2825,2525 2900,2600 2900,2662.5 2887.5,2675 2887.5,2737.5 2900,2750 2925,2750 2950,2775 2950,2787.5 2987.5,2825 3400,2825 3425,2850 3425,2950 3437.5,2962.5 3612.5,2962.5 3625,2950 3625,2875 3662.5,2837.5 3812.5,2837.5 3825,2850 3825,2925 3950,3050 U90.21@4475,3050
TF7: U90.22 U265.2 | length 2377
  TopLayer w6: U265.2@2550,2493 2550,2537.5 2562.5,2550 v1(2575.5,2550) ; v1(4525,2962.5) U90.22@4525,3050
  MidLayer2 w6: v1(2575.5,2550) 2600.5,2525 3087.5,2525 3112.5,2550 3112.5,2675 3337.5,2900 4462.5,2900 v1(4525,2962.5)
TFAN: U4.4 U8.8 | length 4514.1
  TopLayer w6: U8.8@950,3408 950,3462.5 v1(975,3487.5) ; v1(1150,7538) U4.4@1150,7615
  MidLayer3 w6: v1(975,3487.5) 1087.5,3600 1137.5,3600 1162.5,3625 1162.5,3650 1187.5,3675 1237.5,3675 1275,3712.5 1275,3862.5 1350,3937.5 1350,4312.5 1312.5,4350 1312.5,6437.5 1175,6575 1175,7513 v1(1150,7538)
TFDONE: U10.16 U77.11 U260.8 | length 11252
  TopLayer w6: v1(2238,8125) U10.16@2360,8125 ; v1(5450,4150) 5475,4175 U77.11@5475,4233 ; 1650,2275 v1(1662.5,2287.5) 1650,2275 ; 1650,2275 U260.8@1650,2165 1650,2275
  MidLayer2 w6: v1(1662.5,2287.5) 1862.5,2287.5 2175,2600 2512.5,2600 2875,2962.5 3475,2962.5 3612.5,3100 4125,3100 4150,3125 4150,3250 4175,3275 4262.5,3275 4550,3562.5 4937.5,3562.5 5450,4075 v1(5450,4150)
  MidLayer3 w6: v1(1662.5,2287.5) 1712.5,2287.5 1762.5,2337.5 1762.5,2800 1787.5,2825 1787.5,3112.5 1837.5,3162.5 1837.5,3500 2125,3787.5 2125,4087.5 2225,4187.5 2225,8112 v1(2238,8125)
  other v1: 1662.5,2287.5
TFLAST: U77.5 U260.37 | length 4680.4
  TopLayer w6: U260.37@1700,2785 v1(1700,2987.5) ; U77.5@5525,4017 v1(5525,4091)
  MidLayer2 w6: v1(1700,2987.5) 2087.5,3375 2862.5,3375 3050,3562.5 3725,3562.5 3937.5,3775 4787.5,3775 4837.5,3825 5050,3825 5412.5,4187.5 5500,4187.5 5525,4162.5 v1(5525,4091)
TPACK: J4.23 U33.1 U81.12 U83.6 U94.11 U95.24 | length 12968.8
  TopLayer w6: v1(2550,8025) U94.11@2740,8025 2797,8025 v1(2809.5,8037.5) ; U83.6@6075,2092 v1(6075,2162.5) ; 4000,2525 U95.24@3950,2525 4000,2525 ; 4000,2525 v1(4025,2550) 4000,2525 ; 5475,2259 v1(5450,2234) 5475,2259 ; 5475,2259 U81.12@5475,2308 5475,2259 ; U33.1@5325,4392 v1(5325,4478.5) U33.1@5325,4392
  MidLayer1 w6: v1(5325,4478.5) 5300,4453.5 5300,4037.5 5425,3912.5 5425,2259 v1(5450,2234)
  MidLayer3 w6: v1(2809.5,8037.5) 2825,8037.5 3225,7637.5 3225,7475 3462.5,7237.5 3462.5,6975 3500,6937.5 3675,6937.5 3700,6912.5 3700,6737.5 3750,6687.5 3750,6662.5 4025,6387.5 4025,5962.5 4225,5762.5 4225,5600 4500,5325 4500,4700 4721.5,4478.5 v1(5325,4478.5) ; v1(5450,2234) 5321.5,2362.5 ; v1(6075,2162.5) 6037.5,2125 5559,2125 5321.5,2362.5 ; 4212.5,2362.5 v1(4025,2550) 4212.5,2362.5 ; 4212.5,2362.5 5321.5,2362.5 ; 4212.5,2362.5 5321.5,2362.5
  MidLayer4 w6: J4.23@2150,8800 2150,8425 v1(2550,8025)
  other v1: 5450,2234 4025,2550 5325,4478.5
TPRDY: U33.3 U94.10 | length 5502.7
  TopLayer w6: U94.10@2740,8075 v1(2800,8075) ; U33.3@5425,4392 v1(5425,4450)
  MidLayer3 w6: v1(2800,8075) 2825,8100 3850,8100 3887.5,8062.5 3925,8062.5 4475,7512.5 4475,6987.5 4725,6737.5 4725,6262.5 4950,6037.5 4950,5912.5 5125,5737.5 5125,5462.5 5387.5,5200 5387.5,4487.5 v1(5425,4450)
TRC0: U2.43 U47.15 | length 5702.9
  TopLayer w6: U2.43@900,6540 900,6587.5 v1(925,6612.5) ; v1(5675,6687.5) U47.15@5675,6758
  MidLayer5 w6: v1(925,6612.5) 1012.5,6525 3287.5,6525 3487.5,6725 3512.5,6725 3587.5,6800 3662.5,6800 4087.5,7225 4912.5,7225 4937.5,7200 4937.5,7100 4925,7087.5 4925,7062.5 4937.5,7050 4975,7050 5000,7075 5512.5,7075 5675,6912.5 v1(5675,6687.5)
TRC1: U2.42 U47.12 | length 5925.4
  TopLayer w6: U2.42@850,6540 v1(850,6625) ; v1(5825,6700) U47.12@5825,6758
  MidLayer2 w6: v1(850,6625) 900,6575 1625,6575 1900,6850 1900,6862.5 1987.5,6950 3862.5,6950 4150,7237.5 5100,7237.5 5550,6787.5 5900,6787.5 5925,6762.5 5925,6675 5912.5,6662.5 5862.5,6662.5 v1(5825,6700)
TRC2: U2.41 U47.10 | length 5579.7
  TopLayer w6: U2.41@800,6540 800,6587.5 v1(812.5,6600) ; v1(5900,6688) 5925,6713 U47.10@5925,6758
  MidLayer2 w6: v1(812.5,6600) 875,6537.5 2512.5,6537.5 2875,6900 3462.5,6900 3475,6912.5 3912.5,6912.5 4000,7000 5000,7000 5262.5,6737.5 5850.5,6737.5 v1(5900,6688)
TRC3: U2.28 U47.7 | length 6178.2
  TopLayer w6: U2.28@750,7160 v1(750,7237.5) ; U47.7@5925,6543 v1(5925,6600)
  MidLayer2 w6: v1(750,7237.5) 950,7037.5 1912.5,7037.5 1925,7025 2037.5,7025 2100,6962.5 3375,6962.5 3800,7387.5 4675,7387.5 4762.5,7300 5462.5,7300 5475,7287.5 5475,7275 5850,6900 5937.5,6900 6000,6837.5 6000,6675 v1(5925,6600)
TTP: U10.7 U11.11 U58.39 | length 5308.8
  TopLayer w6: v1(2165.5,4825) U11.11@2235,4825 ; U10.7@2360,7675 v1(2442,7675) ; v1(600,5600) U58.39@665,5600 v1(600,5600)
  MidLayer6 w6: v1(600,5600) 875,5325 1665.5,5325 v1(2165.5,4825)
  BottomLayer w6: v1(600,5600) 725,5725 900,5725 925,5750 925,6212.5 1350,6637.5 1400,6637.5 1925,7162.5 1925,7275 2125,7475 2125,7650 2150,7675 v1(2442,7675)
  other v1: 600,5600
TTPDONE: U10.17 U57.20 U58.41 U260.21 | length 7867.9
  TopLayer w6: U58.41@775,5540 v1(775,5613) ; v1(2062.5,6100) 2050,6112.5 U57.20@2050,6160 ; v1(2100,2375) U260.21@2160,2375 ; v1(2237.5,8175) U10.17@2360,8175 ; U57.20@2050,6160 v1(2050,6037.5) U57.20@2050,6160
  MidLayer1 w6: v1(2050,6037.5) 2075,6012.5 2075,3725 2050,3700 2050,3462.5 2075,3437.5 2075,2400 v1(2100,2375) ; v1(2062.5,6100) 2175,6212.5 2175,8112.5 v1(2237.5,8175)
  MidLayer5 w6: v1(775,5613) 1199.5,6037.5 v1(2050,6037.5)
  other v1: 2050,6037.5
TXQS: U10.4 U262.9 | length 6241.2
  TopLayer w6: v1(2200,7537.5) U10.4@2200,7615 ; v1(2850,2237.5) U262.9@2850,2308
  MidLayer1 w6: v1(2200,7537.5) 2200,4600 2175,4575 2175,3600 2212.5,3562.5 2212.5,3462.5 2200,3450 2200,2187.5 2250,2137.5 2662.5,2137.5 2725,2200 2812.5,2200 v1(2850,2237.5)
TXST: U4.16 U16.3 U114.14 U241.3 U260.38 | length 10412
  TopLayer w6: U4.16@1310,8125 v1(1392,8125) ; U260.38@1650,2785 v1(1650,2854.5) ; U114.14@4200,5158 v1(4200,5212.5) ; U241.3@1975,4092 v1(1975,4203.5) ; U241.3@1975,4092 v1(1975,4203.5) ; U241.3@1975,4092 v1(1975,4203.5) ; v1(775,3518) U16.3@775,3592 v1(775,3518)
  MidLayer3 w6: v1(1392,8125) 1775,7742 1775,7087.5 2025,6837.5 2025,6412.5 1875,6262.5 1875,6050 1800,5975 1800,4637.5 1975,4462.5 v1(1975,4203.5)
  MidLayer5 w6: v1(775,3518) 832,3518 875,3475 900,3475 1200,3775 1387.5,3775 1687.5,4075 1812.5,4075 1875,4137.5 1875,4187.5 1891,4203.5 v1(1975,4203.5) 2396.5,4625 3037.5,4625 3387.5,4975 3512.5,4975 3750,5212.5 v1(4200,5212.5)
  MidLayer6 w6: v1(775,3518) 775,3462.5 862.5,3375 1050,3375 1200,3225 1279.5,3225 v1(1650,2854.5)
  other v1: 775,3518 1975,4203.5 1975,4203.5
TXTO: U10.18 U33.8 U81.9 | length 8235.1
  TopLayer w6: U10.18@2300,8235 2300,8275 v1(2375,8275) ; v1(5575,2250) 5600,2250 5625,2275 U81.9@5625,2308 ; U33.8@5625,4608 v1(5625,4682) U33.8@5625,4608
  MidLayer1 w6: v1(5575,2250) 5500,2325 5500,3075 5575,3150 5575,4112.5 5625,4162.5 v1(5625,4682)
  MidLayer4 w6: v1(4012.5,7362.5) 4312.5,7062.5 4312.5,6737.5 5025,6025 5025,5562.5 5312.5,5275 5312.5,5125 5425,5012.5 5425,4882 v1(5625,4682)
  MidLayer6 w6: v1(2375,8275) 3012.5,7637.5 3562.5,7637.5 3837.5,7362.5 v1(4012.5,7362.5)
  other v1: 5625,4682